# Altium PCB Thermistors Matrix.PcbDoc
Units mm, origin at the board's own origin, x right, y up, seen from the top; angles counter-clockwise.
Board outline 101.6 x 101.6 mm, 6 copper layers (Top Layer, L1, L2 (GND), L3, L4, Bottom Layer), stack 1.8 mm thick; 68 components, 65 nets, 192 pads, 0 vias.
Unrouted connection lines stored in the file: 67.
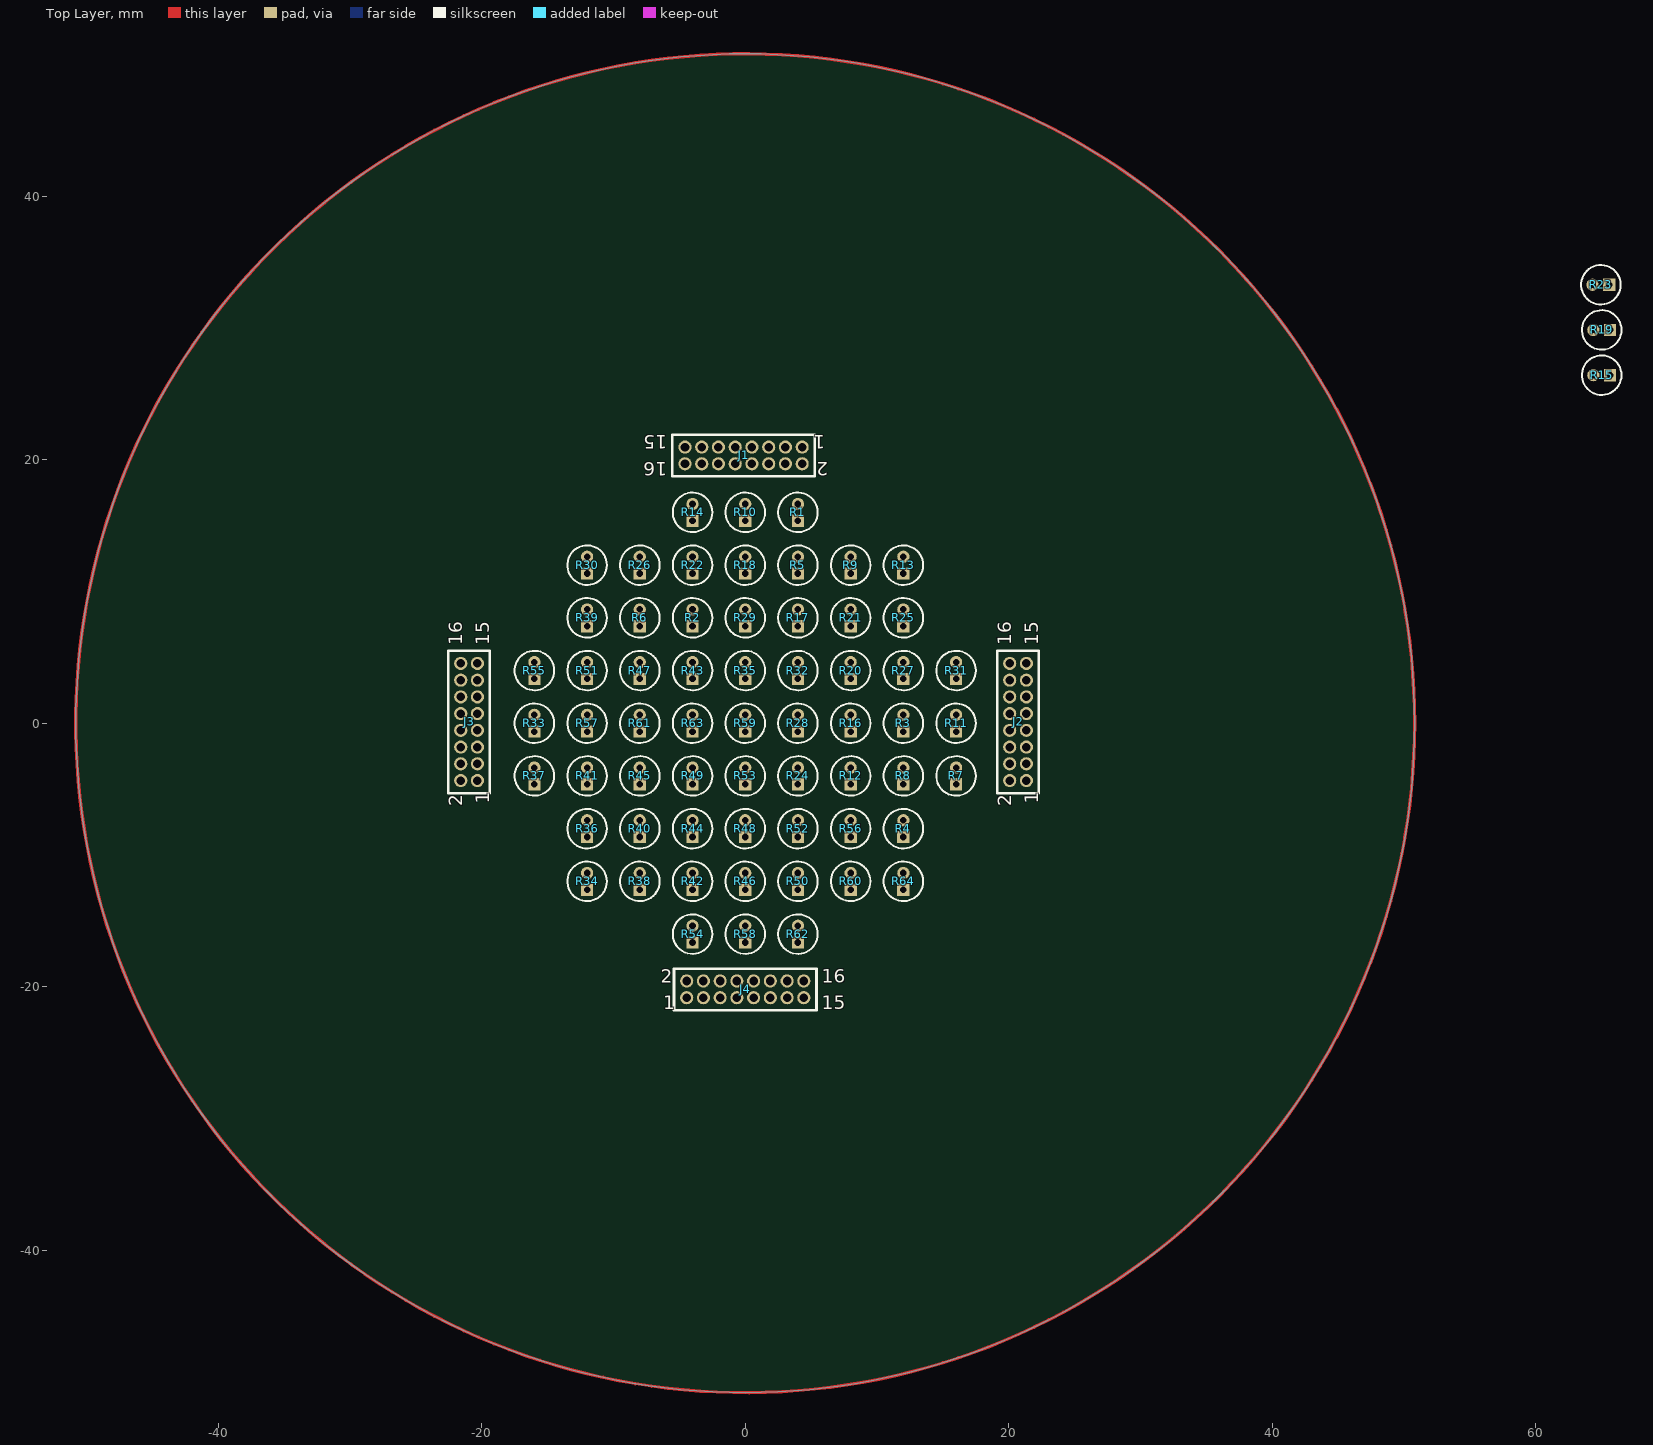
[diagram p0: Top Layer view]
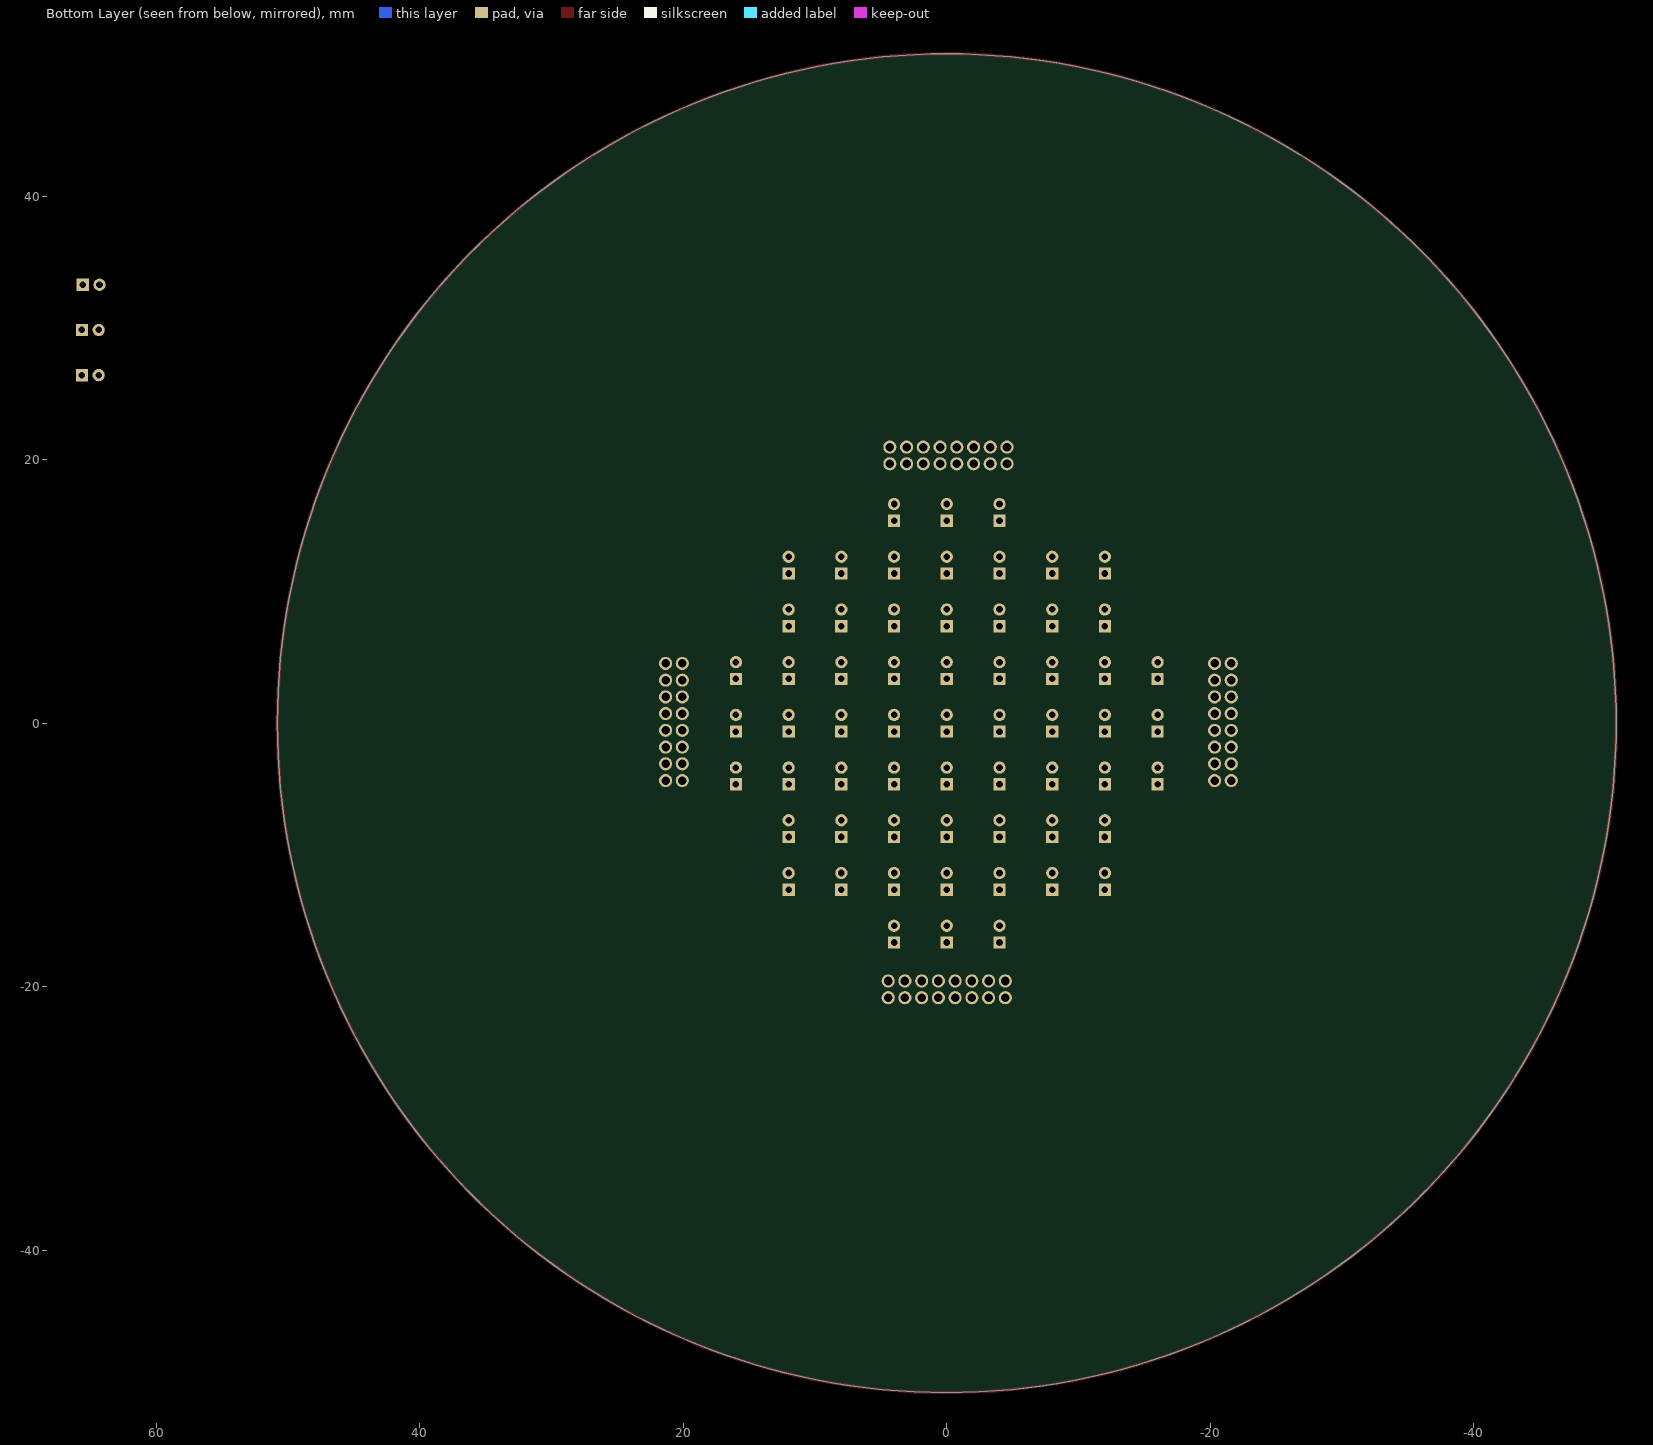
[diagram p1: Bottom Layer view, seen from below]
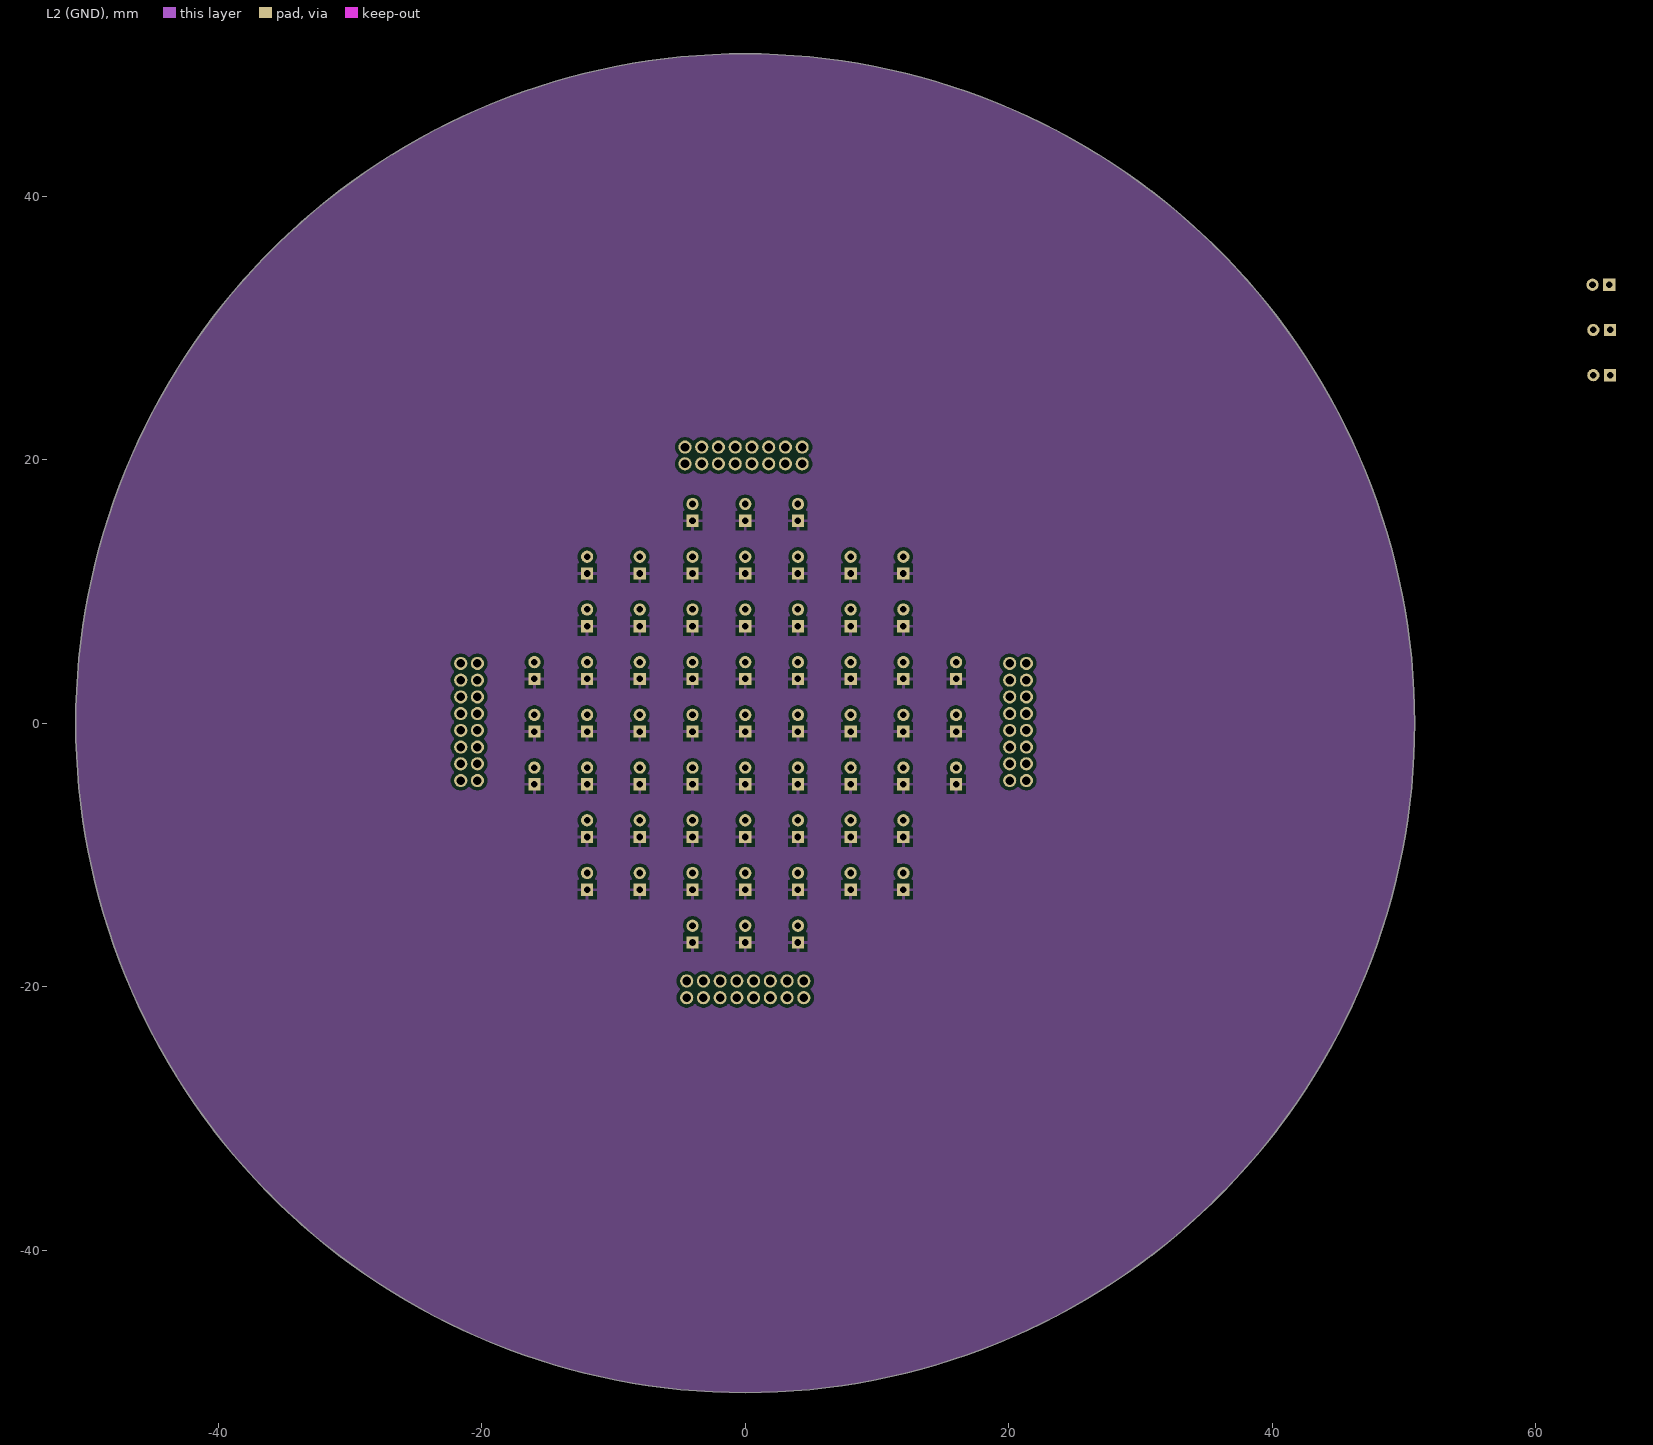
[diagram p2: L2 (GND)]

## Layer stack, top to bottom
Top Solder: solder mask 0.0254, Solder Resist, Dk 3.5
Top Layer: signal copper 0.035
Dielectric 2: prepreg 0.09, PP-017, Dk 4.3
L1: signal copper 0.035
Dielectric 4: prepreg 0.09, PP-017, Dk 4.3
L2 (GND): signal copper 0.0175
Dielectric 1: core 1.265, Core-039, Dk 4.8
L3: signal copper 0.0175
Dielectric 5: prepreg 0.09, PP-017, Dk 4.3
L4: signal copper 0.035
Dielectric 3: prepreg 0.09, PP-017, Dk 4.3
Bottom Layer: signal copper 0.035
Bottom Solder: solder mask 0.0254, Solder Resist, Dk 3.5

## Board outline
0,-50.8 cw(c0,0) -50.8,0 cw(c0,0) 0,50.8 cw(c0,0) 50.8,0 cw(c0,0)

## Design rules (kind name [scope] priority, off if disabled: settings)
Clearance [All] p1: gap=0.25 ignorepadtopadclearanceinfootprint=TRUE
PolygonConnect [All] p1: connectstyle=Relief reliefconductorwidth=0.254 reliefentries=4 polygonreliefangle="90 Angle" airgapwidth=0.254
RoomDefinition Matrix [InComponentClass('Matrix')] p1: confinementstyle=ConfineIn formatcopy=TRUE lockcomponents=FALSE outline -78.74,-84.836 -27.94,-84.836 -27.94,-59.436 -78.74,-59.436
RoutingVias [All] p1: holewidth=0.3 width=0.7 viastyle="Through Hole" minholewidth=0.3 minwidth=0.7 maxholewidth=0.3 maxwidth=0.7
SolderMaskExpansion [All] p1: expansion=0.102 istentingtop=FALSE
UnRoutedNet [All] p1: checkbadconnections=TRUE
Width [All] p1: maxlimit=0.25 minlimit=0.25 preferedwidth=0.25
29 further rules are at their usual default settings.

## Components (designator, comment, footprint, x,y, rotation, side; value= is the part's Value field where it differs from the comment)
J1 "62201621821" 62201621821 -0.127,20.32 r180 top
J2 "62201621821" 62201621821 20.701,0.095 r90 top
J3 "62201621821" 62201621821 -20.955,0.095 r90 top
J4 "62201621821" 62201621821 0,-20.193 r0 top
R1 "NTCLE413E2103F524A" NTCLE413E2103F524A 4,16 r90 top
R2 "NTCLE413E2103F524A" NTCLE413E2103F524A -4,8 r90 top
R3 "NTCLE413E2103F524A" NTCLE413E2103F524A 12,0 r90 top
R4 "NTCLE413E2103F524A" NTCLE413E2103F524A 12,-8 r90 top
R5 "NTCLE413E2103F524A" NTCLE413E2103F524A 4,12 r90 top
R6 "NTCLE413E2103F524A" NTCLE413E2103F524A -8,8 r90 top
R7 "NTCLE413E2103F524A" NTCLE413E2103F524A 16,-4 r90 top
R8 "NTCLE413E2103F524A" NTCLE413E2103F524A 12,-4 r90 top
R9 "NTCLE413E2103F524A" NTCLE413E2103F524A 8,12 r90 top
R10 "NTCLE413E2103F524A" NTCLE413E2103F524A 0,16 r90 top
R11 "NTCLE413E2103F524A" NTCLE413E2103F524A 16,0 r90 top
R12 "NTCLE413E2103F524A" NTCLE413E2103F524A 8,-4 r90 top
R13 "NTCLE413E2103F524A" NTCLE413E2103F524A 12,12 r90 top
R14 "NTCLE413E2103F524A" NTCLE413E2103F524A -4,16 r90 top
R15 "NTCLE413E2103F524A" NTCLE413E2103F524A 64.992,26.416 r180 top
R16 "NTCLE413E2103F524A" NTCLE413E2103F524A 8,0 r90 top
R17 "NTCLE413E2103F524A" NTCLE413E2103F524A 4,8 r90 top
R18 "NTCLE413E2103F524A" NTCLE413E2103F524A 0,12 r90 top
R19 "NTCLE413E2103F524A" NTCLE413E2103F524A 64.992,29.845 r180 top
R20 "NTCLE413E2103F524A" NTCLE413E2103F524A 8,4 r90 top
R21 "NTCLE413E2103F524A" NTCLE413E2103F524A 8,8 r90 top
R22 "NTCLE413E2103F524A" NTCLE413E2103F524A -4,12 r90 top
R23 "NTCLE413E2103F524A" NTCLE413E2103F524A 64.929,33.274 r180 top
R24 "NTCLE413E2103F524A" NTCLE413E2103F524A 4,-4 r90 top
R25 "NTCLE413E2103F524A" NTCLE413E2103F524A 12,8 r90 top
R26 "NTCLE413E2103F524A" NTCLE413E2103F524A -8,12 r90 top
R27 "NTCLE413E2103F524A" NTCLE413E2103F524A 12,4 r90 top
R28 "NTCLE413E2103F524A" NTCLE413E2103F524A 4,0 r90 top
R29 "NTCLE413E2103F524A" NTCLE413E2103F524A 0,8 r90 top
R30 "NTCLE413E2103F524A" NTCLE413E2103F524A -12,12 r90 top
R31 "NTCLE413E2103F524A" NTCLE413E2103F524A 16,4 r90 top
R32 "NTCLE413E2103F524A" NTCLE413E2103F524A 4,4 r90 top
R33 "NTCLE413E2103F524A" NTCLE413E2103F524A -16,0 r90 top
R34 "NTCLE413E2103F524A" NTCLE413E2103F524A -12,-12 r90 top
R35 "NTCLE413E2103F524A" NTCLE413E2103F524A 0,4 r90 top
R36 "NTCLE413E2103F524A" NTCLE413E2103F524A -12,-8 r90 top
R37 "NTCLE413E2103F524A" NTCLE413E2103F524A -16,-4 r90 top
R38 "NTCLE413E2103F524A" NTCLE413E2103F524A -8,-12 r90 top
R39 "NTCLE413E2103F524A" NTCLE413E2103F524A -12,8 r90 top
R40 "NTCLE413E2103F524A" NTCLE413E2103F524A -8,-8 r90 top
R41 "NTCLE413E2103F524A" NTCLE413E2103F524A -12,-4 r90 top
R42 "NTCLE413E2103F524A" NTCLE413E2103F524A -4,-12 r90 top
R43 "NTCLE413E2103F524A" NTCLE413E2103F524A -4,4 r90 top
R44 "NTCLE413E2103F524A" NTCLE413E2103F524A -4,-8 r90 top
R45 "NTCLE413E2103F524A" NTCLE413E2103F524A -8,-4 r90 top
R46 "NTCLE413E2103F524A" NTCLE413E2103F524A 0,-12 r90 top
R47 "NTCLE413E2103F524A" NTCLE413E2103F524A -8,4 r90 top
R48 "NTCLE413E2103F524A" NTCLE413E2103F524A 0,-8 r90 top
R49 "NTCLE413E2103F524A" NTCLE413E2103F524A -4,-4 r90 top
R50 "NTCLE413E2103F524A" NTCLE413E2103F524A 4,-12 r90 top
R51 "NTCLE413E2103F524A" NTCLE413E2103F524A -12,4 r90 top
R52 "NTCLE413E2103F524A" NTCLE413E2103F524A 4,-8 r90 top
R53 "NTCLE413E2103F524A" NTCLE413E2103F524A 0,-4 r90 top
R54 "NTCLE413E2103F524A" NTCLE413E2103F524A -4,-16 r90 top
R55 "NTCLE413E2103F524A" NTCLE413E2103F524A -16,4 r90 top
R56 "NTCLE413E2103F524A" NTCLE413E2103F524A 8,-8 r90 top
R57 "NTCLE413E2103F524A" NTCLE413E2103F524A -12,0 r90 top
R58 "NTCLE413E2103F524A" NTCLE413E2103F524A 0,-16 r90 top
R59 "NTCLE413E2103F524A" NTCLE413E2103F524A 0,0 r90 top
R60 "NTCLE413E2103F524A" NTCLE413E2103F524A 8,-12 r90 top
R61 "NTCLE413E2103F524A" NTCLE413E2103F524A -8,0 r90 top
R62 "NTCLE413E2103F524A" NTCLE413E2103F524A 4,-16 r90 top
R63 "NTCLE413E2103F524A" NTCLE413E2103F524A -4,0 r90 top
R64 "NTCLE413E2103F524A" NTCLE413E2103F524A 12,-12 r90 top

## Footprints (in the part's own frame and the unit in brackets; to place one, negate y for a bottom-side part, rotate by r counter-clockwise, add the part's x,y. Pads: shape width x height; smd on the part's side, far side on the other; paste and mask are expansions set on the pad)
62201621821 [mm] "Socket Header, Pitch 1.27 mm, THT, Vertical, dual row, 16p"
  round 1 hole 0.65: 1(-4.445,-0.635) 2(-4.445,0.635) 3(-3.175,-0.635) 4(-3.175,0.635) 5(-1.905,-0.635) 6(-1.905,0.635) 7(-0.635,-0.635) 8(-0.635,0.635) 9(0.635,-0.635) 10(0.635,0.635) 11(1.905,-0.635) 12(1.905,0.635) 13(3.175,-0.635) 14(3.175,0.635) 15(4.445,-0.635) 16(4.445,0.635)
  silkscreen extent -5.41,-1.58 5.41,1.58, body extent -5.28,-1.5 5.28,1.5, height 4.55
NTCLE413E2103F524A [mm]
  rect 0.93x0.93 hole 0.5 paste-1000 mask+0: 1(-0.635,0)
  round 0.93 hole 0.5 paste-1000 mask+0: 2(0.635,0)
  silkscreen extent -1.5,-1.5 1.5,1.5, body extent -1.48,-1.5 1.48,1.5, height 2

## Part data
J1 J2 J3 J4: library part CMP-002-00076-1, "THT Vertical Socket Header WR-PHD, Pitch 1.27 mm, Dual Row, 16 pins", RoHS Compliant=Yes
R1 R2 R3 R4 R5 R6 R7 R8 R9 R10 R11 R12 R13 R14 R15 R16 R17 R18 R19 R20 R21 R22 R23 R24 R25 R26 R27 R28 R29 R30 R31 R32 R33 R34 R35 R36 R37 R38 R39 R40 R41 R42 R43 R44 R45 R46 R47 R48 R49 R50 R51 R52 R53 R54 R55 R56 R57 R58 R59 R60 R61 R62 R63 R64: library part CMP-009-00185-17, "NTC epoxy PVC AWG30 105°C 10K 1% 3435K 1% L52 A", RoHS Compliant=Yes

## Nets (pads, with @x,y where several pads share a name; then routed paths per layer and width w, separated by ;. In a path a pad name is that pad's centre, name@x,y a point inside that pad or via, vN(x,y) a via of type N, cw(c..) or ccw(c..) an arc to the next point about the centre after c; other vN are vias at no path point)
GND: R1.1 R2.1 R3.1 R4.1 R5.1 R6.1 R7.1 R8.1 R9.1 R10.1 R11.1 R12.1 R13.1 R14.1 R15.1 R16.1 R17.1 R18.1 R19.1 R20.1 R21.1 R22.1 R23.1 R24.1 R25.1 R26.1 R27.1 R28.1 R29.1 R30.1 R31.1 R32.1 R33.1 R34.1 R35.1 R36.1 R37.1 R38.1 R39.1 R40.1 R41.1 R42.1 R43.1 R44.1 R45.1 R46.1 R47.1 R48.1 R49.1 R50.1 R51.1 R52.1 R53.1 R54.1 R55.1 R56.1 R57.1 R58.1 R59.1 R60.1 R61.1 R62.1 R63.1 R64.1
NetJ1_1: J1.1 R1.2
NetJ1_2: J1.2 R2.2
NetJ1_3: J1.3 R5.2
NetJ1_4: J1.4 R6.2
NetJ1_5: J1.5 R9.2
NetJ1_6: J1.6 R10.2
NetJ1_7: J1.7 R13.2
NetJ1_8: J1.8 R14.2
NetJ1_9: J1.9 R17.2
NetJ1_10: J1.10 R18.2
NetJ1_11: J1.11 R21.2
NetJ1_12: J1.12 R22.2
NetJ1_13: J1.13 R25.2
NetJ1_14: J1.14 R26.2
NetJ1_15: J1.15 R29.2
NetJ1_16: J1.16 R30.2
NetJ2_1: J2.1 R3.2
NetJ2_2: J2.2 R4.2
NetJ2_3: J2.3 R7.2
NetJ2_4: J2.4 R8.2
NetJ2_5: J2.5 R11.2
NetJ2_6: J2.6 R12.2
NetJ2_7: J2.7 R15.2
NetJ2_8: J2.8 R16.2
NetJ2_9: J2.9 R19.2
NetJ2_10: J2.10 R20.2
NetJ2_11: J2.11 R23.2
NetJ2_12: J2.12 R24.2
NetJ2_13: J2.13 R27.2
NetJ2_14: J2.14 R28.2
NetJ2_15: J2.15 R31.2
NetJ2_16: J2.16 R32.2
NetJ3_1: J3.1 R33.2
NetJ3_2: J3.2 R35.2
NetJ3_3: J3.3 R37.2
NetJ3_4: J3.4 R39.2
NetJ3_5: J3.5 R41.2
NetJ3_6: J3.6 R43.2
NetJ3_7: J3.7 R45.2
NetJ3_8: J3.8 R47.2
NetJ3_9: J3.9 R49.2
NetJ3_10: J3.10 R51.2
NetJ3_11: J3.11 R53.2
NetJ3_12: J3.12 R55.2
NetJ3_13: J3.13 R57.2
NetJ3_14: J3.14 R59.2
NetJ3_15: J3.15 R61.2
NetJ3_16: J3.16 R63.2
NetJ4_1: J4.1 R34.2
NetJ4_2: J4.2 R36.2
NetJ4_3: J4.3 R38.2
NetJ4_4: J4.4 R40.2
NetJ4_5: J4.5 R42.2
NetJ4_6: J4.6 R44.2
NetJ4_7: J4.7 R46.2
NetJ4_8: J4.8 R48.2
NetJ4_9: J4.9 R50.2
NetJ4_10: J4.10 R52.2
NetJ4_11: J4.11 R54.2
NetJ4_12: J4.12 R56.2
NetJ4_13: J4.13 R58.2
NetJ4_14: J4.14 R60.2
NetJ4_15: J4.15 R62.2
NetJ4_16: J4.16 R64.2
copper on no net: | length 319.2
  Top Layer w0.254: 50.8,0 ccw(c0,0) 50.8,0

## Polygon pours and split planes (outlines as drawn)
GND on L2 (GND) "Top GND" (solid, remove dead copper, pour order 0): 0,-50.8 cw(c0,0) -50.8,0 cw(c0,0) 0,50.8 cw(c0,0) 50.8,0 cw(c0,0)

## Text inside footprints (layer, text, board x,y; h text height)
J1: Top Overlay "15" at -5.937,21.843 h1.02 r180; Top Overlay "16" at -5.937,19.813 h1.02 r180; Top Overlay "2" at 6.283,19.813 h1.02 r180; Top Overlay "1" at 6.083,21.843 h1.02 r180
J2: Top Overlay "15" at 22.224,5.905 h1.02 r90; Top Overlay "16" at 20.194,5.905 h1.02 r90; Top Overlay "2" at 20.194,-6.315 h1.02 r90; Top Overlay "1" at 22.224,-6.115 h1.02 r90
J3: Top Overlay "15" at -19.432,5.905 h1.02 r90; Top Overlay "16" at -21.462,5.905 h1.02 r90; Top Overlay "2" at -21.462,-6.315 h1.02 r90; Top Overlay "1" at -19.432,-6.115 h1.02 r90
J4: Top Overlay "15" at 5.81,-21.716 h1.02; Top Overlay "16" at 5.81,-19.686 h1.02; Top Overlay "2" at -6.41,-19.686 h1.02; Top Overlay "1" at -6.21,-21.716 h1.02